# Altium PCB LP_LED_CUBE_8x8x8.PcbDoc (part 1 of 2)
Units mil, origin at the board's own origin, x right, y up, seen from the top; angles counter-clockwise.
Board outline 4240 x 2580 mil, 2 copper layers (Top Layer, Bottom Layer), stack 42.17 mil thick; 171 components, 249 nets, 833 pads, 0 vias.
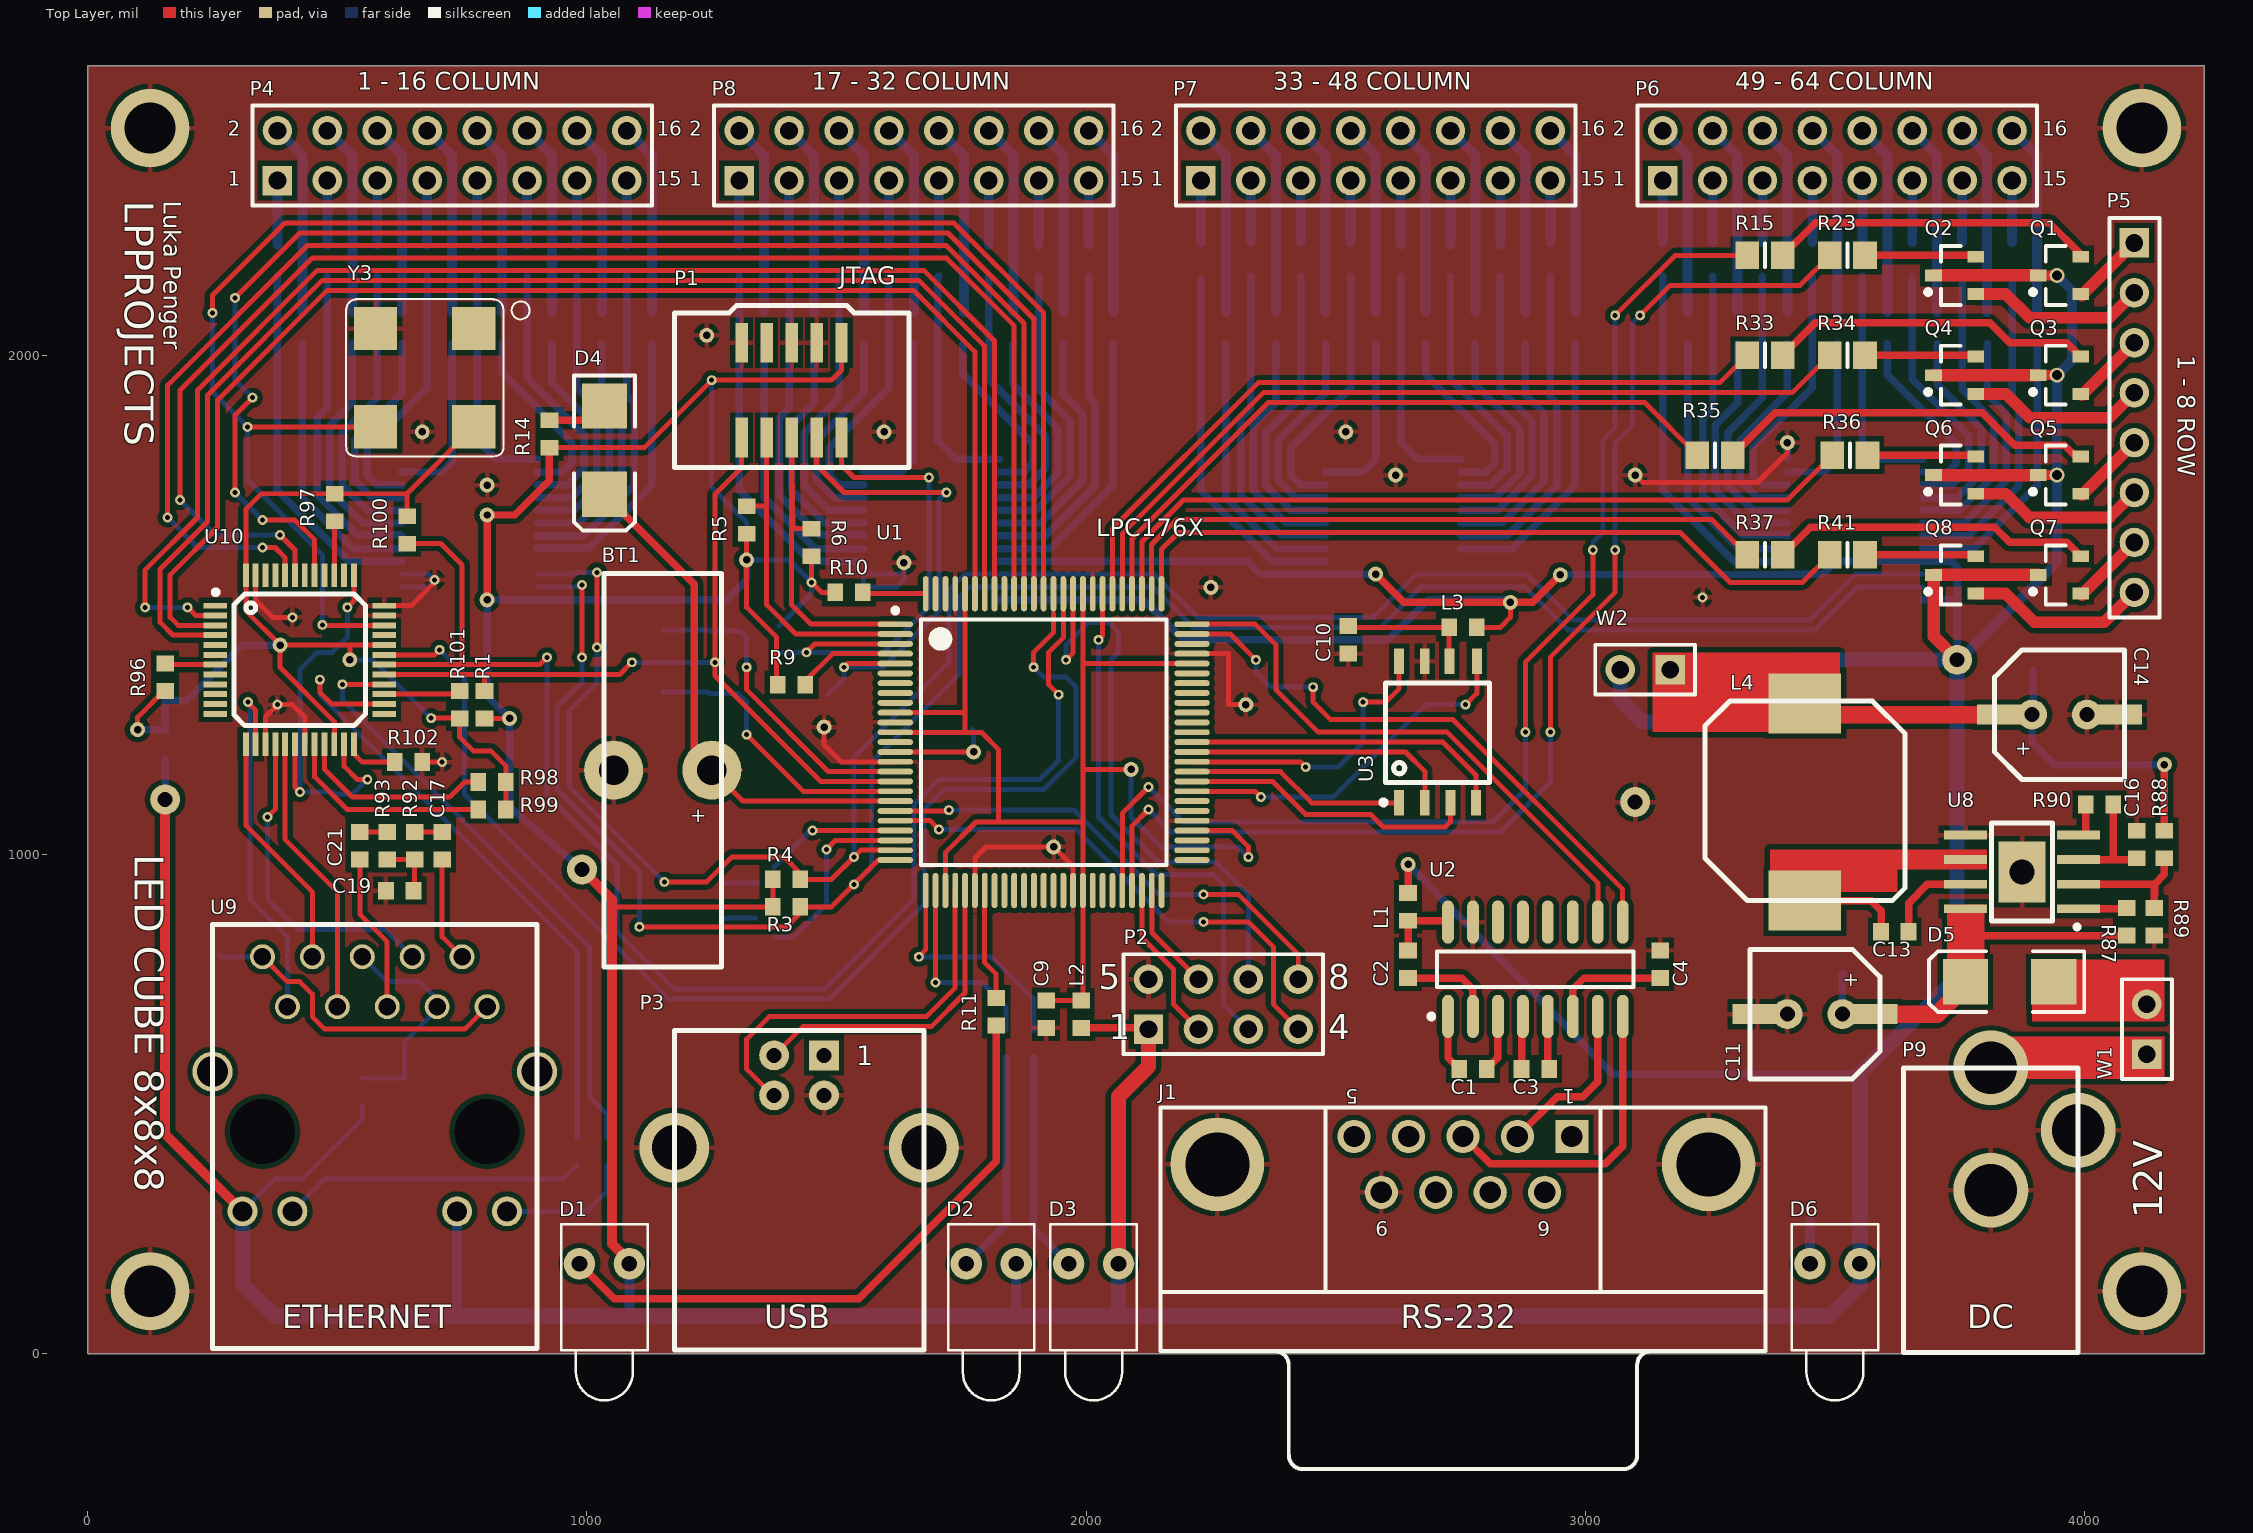
[diagram p0: Top Layer view]
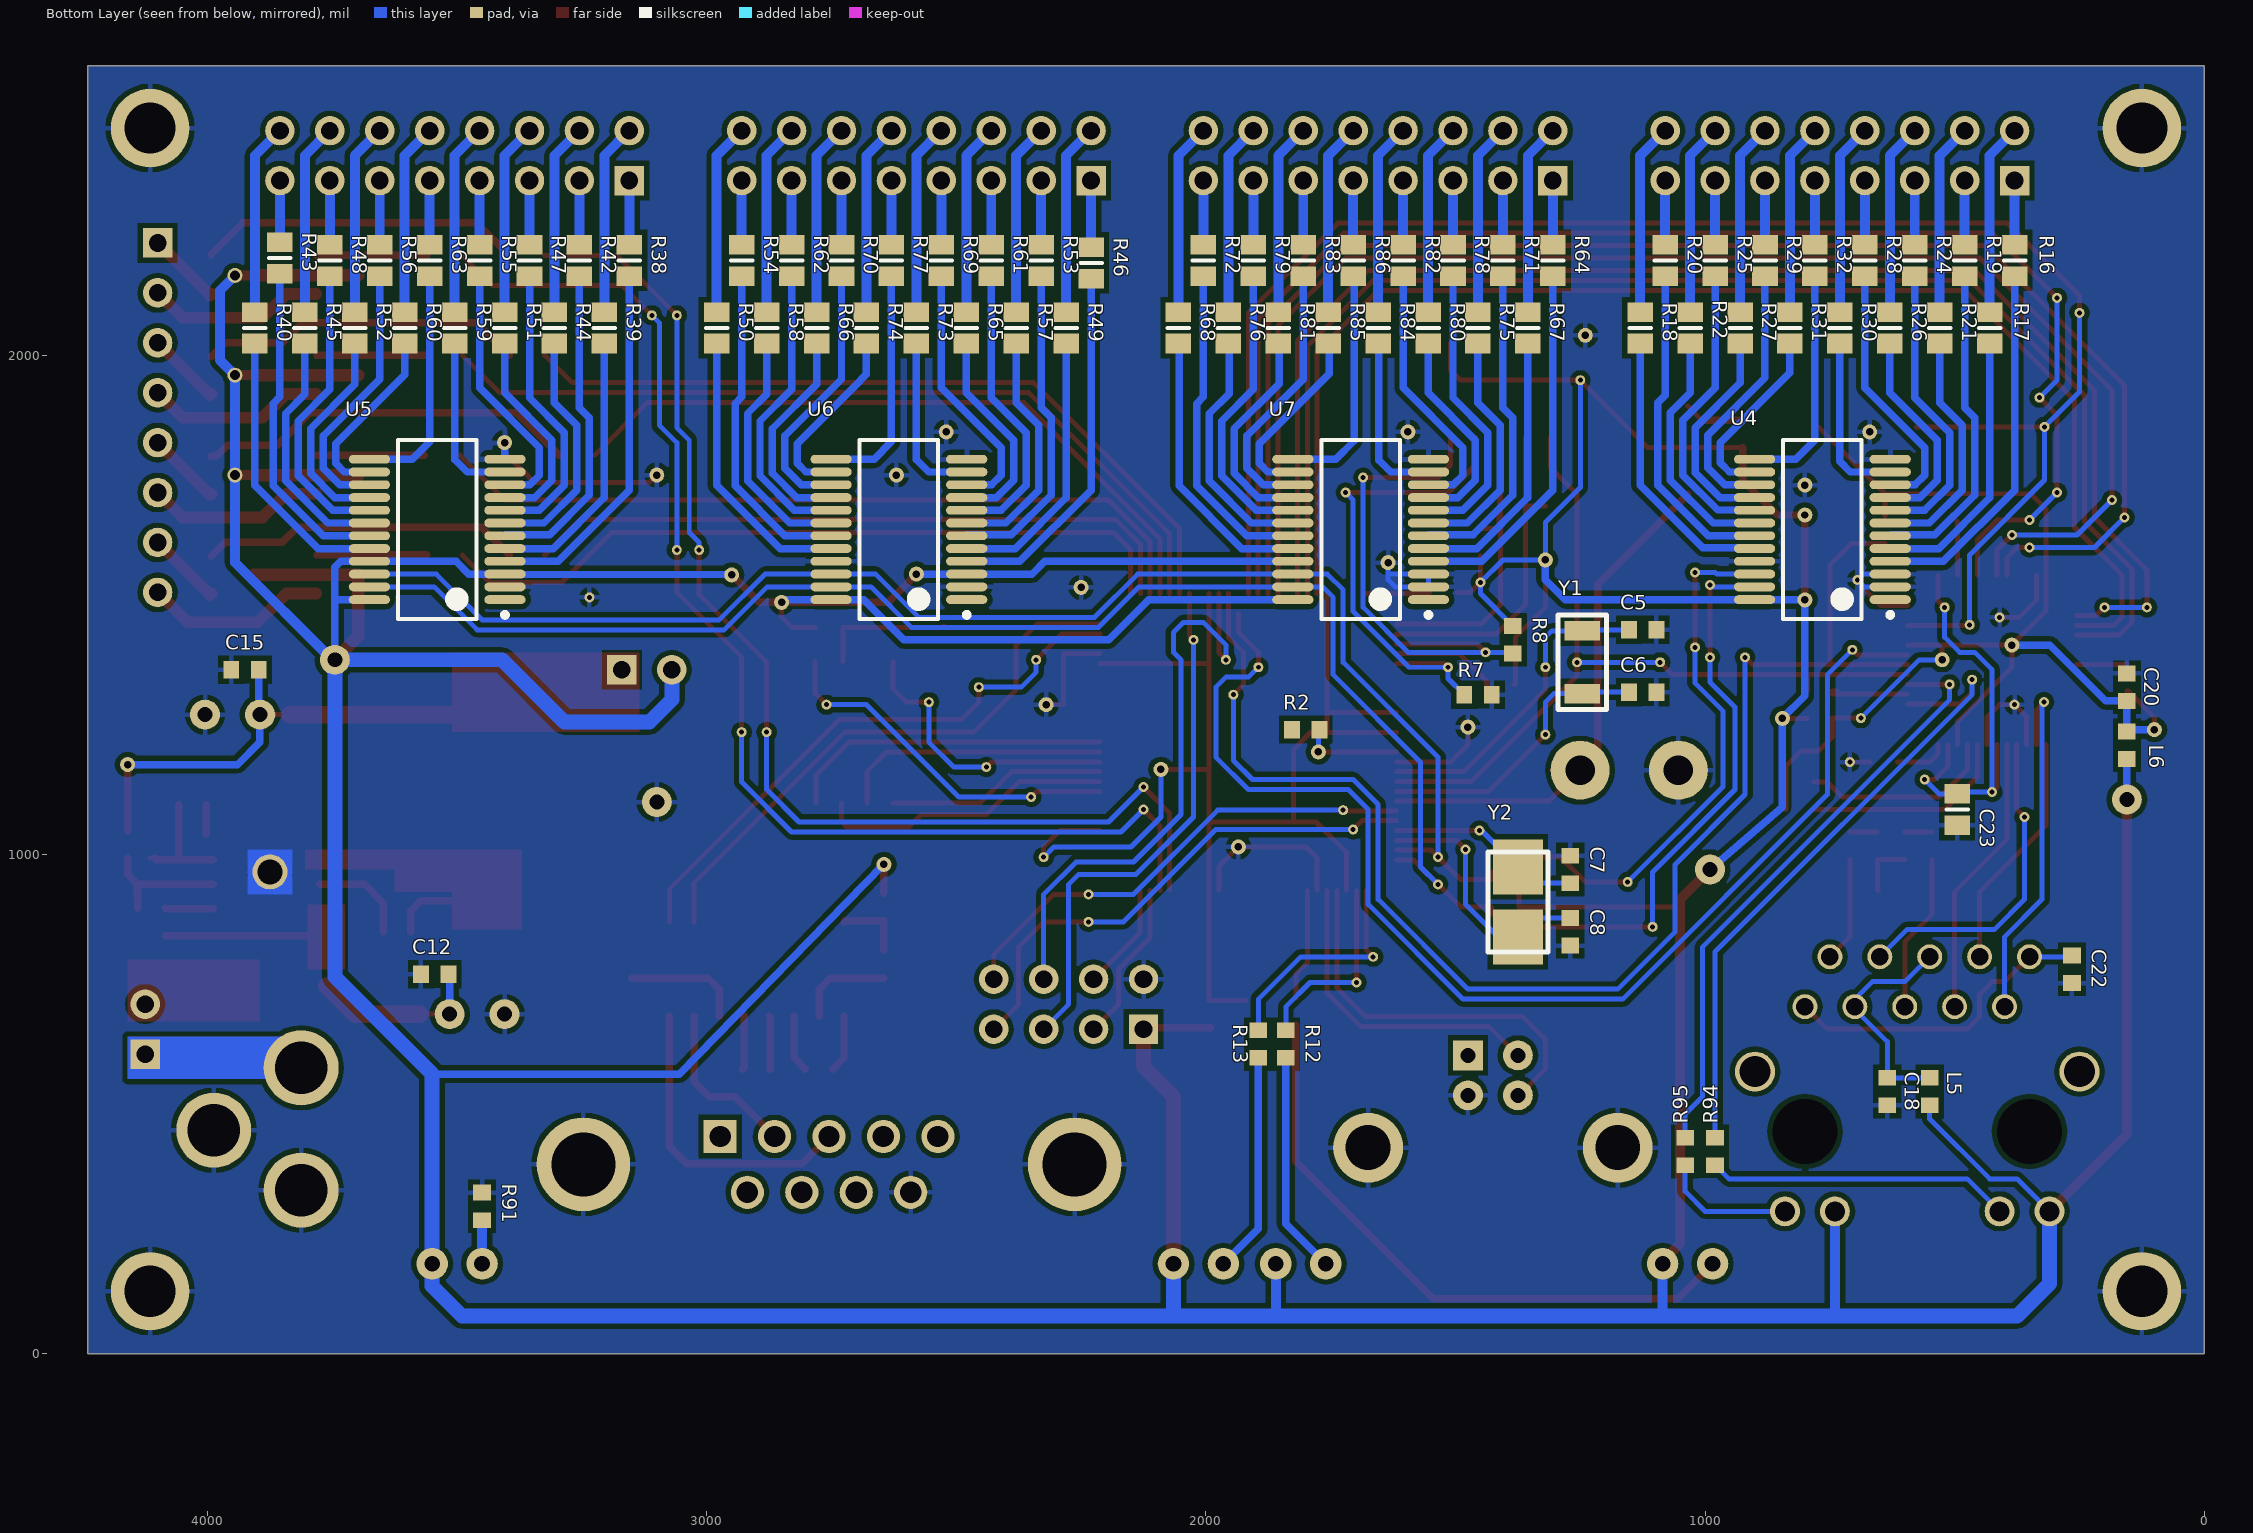
[diagram p1: Bottom Layer view, seen from below]

## Layer stack, top to bottom
Top Layer: signal copper 1.4
Dielectric: core 39.3701, FR-4, Dk 4.8
Bottom Layer: signal copper 1.4

## Board outline
4240,2580 4240,0 0,0 0,2580

## Design rules (kind name [scope] priority, off if disabled: settings)
Clearance [All] p1: gap=10
PolygonConnect [All] p1: connectstyle=Relief reliefconductorwidth=10 reliefentries=4 polygonreliefangle="90 Angle"
RoutingVias [All] p1: holewidth=28 width=50 viastyle="Through Hole" minholewidth=28 minwidth=50 maxholewidth=28 maxwidth=50
SilkscreenOverComponentPads [All] p1: minsilkscreentomaskgap=10
SolderMaskExpansion [All] p1: expansion=4
Width [All] p1: maxlimit=10 minlimit=10 preferedwidth=10
27 further rules are at their usual default settings.

## Classes and differential pairs
component class POWER: C11 C12 C13 C14 C15 C16 D5 D6 L4 P9 R87 R88 R89 R90 R91 U8 W1 W2
component class LED: P4 P5 P6 P7 P8 Q1 Q2 Q3 Q4 Q5 Q6 Q7 Q8 R15 R16 R17 R18 R19 R20 R21 R22 R23 R24 R25 R26 R27 R28 R29 R30 R31 R32 R33 R34 R35 R36 R37 R38 R39 R40 R41 R42 R43 R44 R45 R46 R47 R48 R49 R50 R51 R52 R53 R54 R55 R56 R57 R58 R59 R60 R61 R62 R63 R64 R65 R66 R67 R68 R69 R70 R71 R72 R73 R74 R75 R76 R77 R78 R79 R80 R81 R82 R83 R84 R85 R86 U4 U5 U6 U7
component class ETH: C17 C18 C19 C20 C21 C22 C23 L5 L6 R92 R93 R94 R95 R96 R97 R98 R99 R100 R101 R102 U9 U10 Y3
component class CPU: BT1 C1 C2 C3 C4 C5 C6 C7 C8 C9 C10 D1 D2 D3 D4 J1 L1 L2 L3 P1 P2 R1 R2 R3 R4 R5 R6 R7 R8 R9 R10 R11 R12 R13 R14 U1 U2 U3 Y1 Y2

## Components (designator, comment, footprint, x,y, rotation, side; value= is the part's Value field where it differs from the comment)
BT1 "Battery" "Battery CAP" 1270,775 r180 top
C1 "100n" 1608[0603] 2775,570 r180 top
C2 "100n" 1608[0603] 2645,780 r90 top
C3 "100n" 1608[0603] 2900,570 r180 top
C4 "100n" 1608[0603] 3150,780 r270 top
C5 "22p" 1608[0603] 1125,1450 r0 bottom
C6 "22p" 1608[0603] 1125,1325 r0 bottom
C7 "22p" 1608[0603] 1270,970 r270 bottom
C8 "22p" 1608[0603] 1270,845 r90 bottom
C9 "100n" 1608[0603] 1920,680 r90 top
C10 "100n" 1608[0603] 2525,1430 r90 top
C11 "220uF" "SMD CAPACITOR 220uF" 3460,680 r270 top
C12 "100n" 1608[0603] 3545,760 r0 bottom
C13 "0.47uF" 1608[0603] 3620,845 r180 top
C14 "220uF" "SMD CAPACITOR 220uF" 3950,1280 r90 top
C15 "100n" 1608[0603] 3925,1370 r0 bottom
C16 "0.47uF" 1608[0603] 4105,1020 r90 top
C17 "22n" 1608[0603] 710,1017.56 r90 top
C18 "100n" 1608[0603] 635,525 r270 bottom
C19 "1n" 1608[0603] 625,927.56 r180 top
C20 "100n" 1608[0603] 155,1335 r90 bottom
C21 "22n" 1608[0603] 545,1017.56 r90 top
C22 "NO" 1608[0603] 265,770 r90 bottom
C23 "100n" 6-0805_L 495,1090 r270 bottom
D1 "USB LED" LED-1 1035,180 r270 top
D2 "LED1" LED-1 1810,180 r270 top
D3 "LED2" LED-1 2015,180 r270 top
D4 "D Schottky" SMB 1035,1810 r270 top
D5 "Schottky" SMB 3850,745 r180 top
D6 "POWER LED" LED-1 3500,180 r270 top
J1 "RS232" DSUB1.385-2H9 2755,5 r180 top
L1 "Inductor" 1608[0603] 2645,895 r90 top
L2 "Inductor" 1608[0603] 1990,680 r270 top
L3 "Inductor" 1608[0603] 2755,1455 r0 top
L4 "1.5uH" Inductor 3440,1105 r90 top
L5 "Inductor" 1608[0603] 550,525 r270 bottom
L6 "Inductor" 1608[0603] 155,1218.72 r270 bottom
P1 "JTAG Connector ULINK" "JTAG Connector ULINK" 1410,1930 r270 top
P2 "Header 4X2A" HDR2X4_CEN 2125,650 r0 top
P3 "USB B" "USB B" 1425,505 r0 top
P4 "Header 8X2" HDR2X8 380,2350 r0 top
P5 "Header 8" HDR1X8 4100,2225 r270 top
P6 "Header 8X2" HDR2X8 3155,2350 r0 top
P7 "Header 8X2" HDR2X8 2230,2350 r0 top
P8 "Header 8X2" HDR2X8 1305,2350 r0 top
P9 "DC Connector" "DC Connector" 3900,450 r180 top
Q1 "NPN" SOT23_L 3950,2160 r180 top
Q2 "NPN" SOT23_L 3740,2160 r180 top
Q3 "NPN" SOT23_L 3950,1960 r180 top
Q4 "NPN" SOT23_L 3740,1960 r180 top
Q5 "NPN" SOT23_L 3950,1760 r180 top
Q6 "NPN" SOT23_L 3740,1760 r180 top
Q7 "NPN" SOT23_L 3950,1560 r180 top
Q8 "NPN" SOT23_L 3740,1560 r180 top
R1 "10k" 1608[0603] 795,1300 r270 top
R2 "NO" 1608[0603] 1800,1250 r0 bottom
R3 "2k2" 1608[0603] 1400,895 r0 top
R4 "2k2" 1608[0603] 1400,950 r0 top
R5 "10k" 1608[0603] 1320,1670 r270 top
R6 "10k" 1608[0603] 1450,1625 r270 top
R7 "10k" 1608[0603] 1455,1320 r180 bottom
R8 "10k" 1608[0603] 1385,1430 r90 bottom
R9 "10k" 1608[0603] 1410,1340 r180 top
R10 "10k" 1608[0603] 1525,1525 r180 top
R11 "470R" 1608[0603] 1820,685 r270 top
R12 "470R" 1608[0603] 1840,620 r270 bottom
R13 "470R" 1608[0603] 1895,620 r270 bottom
R14 "50R" 1608[0603] 925,1842.44 r270 top
R15 "4k7" 6-0805_N 3360,2200 r180 top
R16 "100R" 6-0805_L 380,2190 r270 bottom
R17 "100R" 6-0805_L 430,2055 r270 bottom
R18 "100R" 6-0805_L 1130,2055 r90 bottom
R19 "100R" 6-0805_L 480,2190 r270 bottom
R20 "100R" 6-0805_L 1080,2190 r90 bottom
R21 "100R" 6-0805_L 530,2055 r270 bottom
R22 "100R" 6-0805_L 1030,2055 r90 bottom
R23 "1k" 6-0805_N 3525,2200 r180 top
R24 "100R" 6-0805_L 580,2190 r270 bottom
R25 "100R" 6-0805_L 980,2190 r90 bottom
R26 "100R" 6-0805_L 630,2055 r270 bottom
R27 "100R" 6-0805_L 930,2055 r90 bottom
R28 "100R" 6-0805_L 680,2190 r270 bottom
R29 "100R" 6-0805_L 880,2190 r90 bottom
R30 "100R" 6-0805_L 730,2055 r270 bottom
R31 "100R" 6-0805_L 830,2055 r90 bottom
R32 "100R" 6-0805_L 780,2190 r90 bottom
R33 "1k" 6-0805_N 3360,2000 r180 top
R34 "1k" 6-0805_N 3525,2000 r180 top
R35 "1k" 6-0805_N 3260,1800 r180 top
R36 "1k" 6-0805_N 3530,1800 r180 top
R37 "1k" 6-0805_N 3360,1600 r180 top
R38 "100R" 6-0805_L 3155,2190 r270 bottom
R39 "100R" 6-0805_L 3205,2055 r270 bottom
R40 "100R" 6-0805_L 3905,2055 r90 bottom
R41 "1k" 6-0805_N 3525,1600 r180 top
R42 "100R" 6-0805_L 3255,2190 r270 bottom
R43 "100R" 6-0805_L 3855,2195 r90 bottom
R44 "100R" 6-0805_L 3305,2055 r270 bottom
R45 "100R" 6-0805_L 3805,2055 r90 bottom
R46 "100R" 6-0805_L 2230,2185 r270 bottom
R47 "100R" 6-0805_L 3355,2190 r270 bottom
R48 "100R" 6-0805_L 3755,2190 r90 bottom
R49 "100R" 6-0805_L 2280,2055 r270 bottom
R50 "100R" 6-0805_L 2980,2055 r90 bottom
R51 "100R" 6-0805_L 3405,2055 r270 bottom
R52 "100R" 6-0805_L 3705,2055 r90 bottom
R53 "100R" 6-0805_L 2330,2190 r270 bottom
R54 "100R" 6-0805_L 2930,2190 r90 bottom
R55 "100R" 6-0805_L 3455,2190 r270 bottom
R56 "100R" 6-0805_L 3655,2190 r90 bottom
R57 "100R" 6-0805_L 2380,2055 r270 bottom
R58 "100R" 6-0805_L 2880,2055 r90 bottom
R59 "100R" 6-0805_L 3505,2055 r270 bottom
R60 "100R" 6-0805_L 3605,2055 r90 bottom
R61 "100R" 6-0805_L 2430,2190 r270 bottom
R62 "100R" 6-0805_L 2830,2190 r90 bottom
R63 "100R" 6-0805_L 3555,2190 r90 bottom
R64 "100R" 6-0805_L 1305,2190 r270 bottom
R65 "100R" 6-0805_L 2480,2055 r270 bottom
R66 "100R" 6-0805_L 2780,2055 r90 bottom
R67 "100R" 6-0805_L 1355,2055 r270 bottom
R68 "100R" 6-0805_L 2055,2055 r90 bottom
R69 "100R" 6-0805_L 2530,2190 r270 bottom
R70 "100R" 6-0805_L 2730,2190 r90 bottom
R71 "100R" 6-0805_L 1405,2190 r270 bottom
R72 "100R" 6-0805_L 2005,2190 r90 bottom
R73 "100R" 6-0805_L 2580,2055 r270 bottom
R74 "100R" 6-0805_L 2680,2055 r90 bottom
R75 "100R" 6-0805_L 1455,2055 r270 bottom
R76 "100R" 6-0805_L 1955,2055 r90 bottom
R77 "100R" 6-0805_L 2630,2190 r90 bottom
R78 "100R" 6-0805_L 1505,2190 r270 bottom
R79 "100R" 6-0805_L 1905,2190 r90 bottom
R80 "100R" 6-0805_L 1555,2055 r270 bottom
R81 "100R" 6-0805_L 1855,2055 r90 bottom
R82 "100R" 6-0805_L 1605,2190 r270 bottom
R83 "100R" 6-0805_L 1805,2190 r90 bottom
R84 "100R" 6-0805_L 1655,2055 r270 bottom
R85 "100R" 6-0805_L 1755,2055 r90 bottom
R86 "100R" 6-0805_L 1705,2190 r90 bottom
R87 "10k" 1608[0603] 4085,865 r270 top
R88 "226k" 1608[0603] 4160,1020 r90 top
R89 "49.9k" 1608[0603] 4140,865 r90 top
R90 "100k" 1608[0603] 4030,1100 r0 top
R91 "470R" 1608[0603] 3450,295 r270 bottom
R92 "75R" 1608[0603] 655,1017.56 r270 top
R93 "75R" 1608[0603] 600,1017.56 r90 top
R94 "470R" 1608[0603] 980,405 r90 bottom
R95 "470R" 1608[0603] 1040,405 r90 bottom
R96 "10k" 1608[0603] 155,1355 r270 top
R97 "2k2" 1608[0603] 495,1695 r270 top
R98 "2k2" 1608[0603] 810,1145 r180 top
R99 "2k2" 1608[0603] 810,1090 r0 top
R100 "2k2" 1608[0603] 640,1650 r270 top
R101 "2k2" 1608[0603] 745,1300 r90 top
R102 "4k7" 1608[0603] 642.44,1185 r0 top
U1 "LPC1768FBD100" SOT407-1_N 1915,1225 r0 top
U2 "MAX2232" SOIC16_N 2900,770 r90 top
U3 "AT45DB321D" AT45DB321D 2705,1245 r90 top
U4 "PCA9555" SSOP24_N 765,1600 r0 bottom
U5 "PCA9555" SSOP24_N 3540,1600 r0 bottom
U6 "PCA9555" SSOP24_N 2615,1600 r0 bottom
U7 "PCA9555" SSOP24_N 1690,1600 r0 bottom
U8 "TPS56528" TPS56528 3875,965 r180 top
U9 "RJ45 Ethernet" "RJ45 Ethernet connector" 575,540 r90 top
U10 "DP83848C" DP83848C 425,1390 r0 top
W1 "Jumper" HDR1X2 4125,600 r90 top
W2 "Jumper" HDR1X2 3170,1370 r180 top
Y1 "32.768KHz" "Crystal 4.1x1.5" 1245,1385 r270 bottom
Y2 "12MHz" "5x3.2 Crystal" 1375,905 r270 bottom
Y3 "XTAL 50MHz" "XTAL ACT9200" 675,1955 r180 top

## Footprints (in the part's own frame and the unit in brackets; to place one, negate y for a bottom-side part, rotate by r counter-clockwise, add the part's x,y. Pads: shape width x height; smd on the part's side, far side on the other; paste and mask are expansions set on the pad)
"5x3.2 Crystal" [mil]
  rect 110x100 smd: 1(-70,0) 2(70,0)
  silkscreen extent -100,-60 100,60
6-0805_L [mm] "Chip Resistor, Body 2.0x1.2mm, IPC High Density"
  rect 1x1.3 smd: 1(-0.8,0) 2(0.8,0)
  silkscreen extent 0,-0.55 0,0.55, body extent -1.07,-0.7 1.07,0.7, height 0.7
6-0805_N [mm] "Chip Resistor, Body 2.0x1.2mm, IPC Medium Density"
  rect 1.2x1.4 smd: 1(-0.9,0) 2(0.9,0)
  silkscreen extent 0,-0.6 0,0.6, body extent -1.07,-0.7 1.07,0.7, height 0.7
1608[0603] [mm] "Chip Capacitor, Body 1.6x0.8mm, IPC High Density"
  rect 0.8x0.9 smd: 1(-0.7,0) 2(0.7,0)
  body extent -0.87,-0.48 0.87,0.48, height 1.3
AT45DB321D [mm] "SPI Flash SOIC 8"
  rect 1.3x0.508 smd: 1(-3.6,1.975) 2(-3.6,0.675) 3(-3.6,-0.625) 4(-3.6,-1.925) 5(3.6,-1.975) 6(3.6,-0.575) 7(3.6,0.675) 8(3.6,1.975)
  silkscreen extent -3.7,-2.62 2.5,2.9
"Battery CAP" [mm]
  round 3 hole 1.5: 1(0.5,-10) 2(5.5,-10)
  silkscreen extent 0,-20 6,0
"Crystal 4.1x1.5" [mm] "Crystal 4.1x1.5"
  rect 1x1.8 smd: 1(-1.6,-0.02) 2(1.6,-0.02)
  silkscreen extent -2.4,-1.25 2.4,1.2
"DC Connector" [mil]
  round 150 hole 105: 1(87.5,-122.5) 2(-87.5,2.5) 3(87.5,122.5)
  silkscreen extent -88,-123 262,448
DP83848C [mm] "Ethernet PHY LQFP48"
  rect 1.2x0.3 smd: 1(-4.3,2.75) 2(-4.3,2.25) 3(-4.3,1.75) 4(-4.3,1.25) 5(-4.3,0.75) 6(-4.3,0.25) 7(-4.3,-0.25) 8(-4.3,-0.75) 9(-4.3,-1.25) 10(-4.3,-1.75) 11(-4.3,-2.25) 12(-4.3,-2.75) 25(4.3,-2.75) 26(4.3,-2.25) 27(4.3,-1.75) 28(4.3,-1.25) 29(4.3,-0.75) 30(4.3,-0.25) 31(4.3,0.25) 32(4.3,0.75) 33(4.3,1.25) 34(4.3,1.75) 35(4.3,2.25) 36(4.3,2.75)
  rect 0.3x1.2 smd: 13(-2.75,-4.3) 14(-2.25,-4.3) 15(-1.75,-4.3) 16(-1.25,-4.3) 17(-0.75,-4.3) 18(-0.25,-4.3) 19(0.25,-4.3) 20(0.75,-4.3) 21(1.25,-4.3) 22(1.75,-4.3) 23(2.25,-4.3) 24(2.75,-4.3) 37(2.75,4.3) 38(2.25,4.3) 39(1.75,4.3) 40(1.25,4.3) 41(0.75,4.3) 42(0.25,4.3) 43(-0.25,4.3) 44(-0.75,4.3) 45(-1.25,4.3) 46(-1.75,4.3) 47(-2.25,4.3) 48(-2.75,4.3)
  silkscreen extent -4.41,-3.35 3.35,3.56
DSUB1.385-2H9 [mm] "Connector; D Subminiature; 9 Position; Right Angle; Pitch 1.385 mm"
  rect 1.69x1.69 hole 1.09: 1(-5.54,-10.92)
  round 1.69 hole 1.09: 2(-2.77,-10.92) 3(0,-10.92) 4(2.77,-10.92) 5(5.54,-10.92) 6(-4.155,-8.08) 7(-1.385,-8.08) 8(1.385,-8.08) 9(4.155,-8.08)
  round 4.76 hole 3.26: 10(-12.495,-9.5) 11(12.495,-9.5)
  silkscreen extent -15.4,-12.4 15.4,6
HDR1X2 [mm] "Connector; Header; 2 Position"
  rect 1.5x1.5 hole 0.9: 1(0,0)
  round 1.5 hole 0.9: 2(2.54,0)
  silkscreen extent -1.27,-1.27 3.81,1.27
HDR1X8 [mm] "Connector; Header; 8 Position"
  rect 1.5x1.5 hole 0.9: 1(0,0)
  round 1.5 hole 0.9: 2(2.54,0) 3(5.08,0) 4(7.62,0) 5(10.16,0) 6(12.7,0) 7(15.24,0) 8(17.78,0)
  silkscreen extent -1.27,-1.27 19.05,1.27
HDR2X4_CEN [mm] "Connector; Header; 4x2 Position"
  rect 1.5x1.5 hole 0.9: 1(0,0)
  round 1.5 hole 0.9: 2(2.54,0) 3(5.08,0) 4(7.62,0) 5(0,2.54) 6(2.54,2.54) 7(5.08,2.54) 8(7.62,2.54)
  silkscreen extent -1.27,-1.27 8.89,3.81
HDR2X8 [mm] "Connector; Header; 8x2 Position"
  rect 1.5x1.5 hole 0.9: 1(0,0)
  round 1.5 hole 0.9: 2(0,2.54) 3(2.54,0) 4(2.54,2.54) 5(5.08,0) 6(5.08,2.54) 7(7.62,0) 8(7.62,2.54) 9(10.16,0) 10(10.16,2.54) 11(12.7,0) 12(12.7,2.54) 13(15.24,0) 14(15.24,2.54) 15(17.78,0) 16(17.78,2.54)
  silkscreen extent -1.27,-1.27 19.05,3.81
Inductor [mil]
  rect 120x145 smd: 1(-197.5,0) 2(197.5,0)
  silkscreen extent -198,-200 202,200
"JTAG Connector ULINK" [mil]
  rect 80x25 smd: 1(-95,100) 2(95,100) 3(-95,50) 4(95,50) 5(-95,0) 6(95,0) 7(-95,-50) 8(95,-50) 9(-95,-100) 10(95,-100)
  silkscreen extent -170,-235 155,235
LED-1 [mm] "LED; 2 Leads"
  round 1.6 hole 0.8: 1(0,1.27) 2(0,-1.27)
  silkscreen extent -2,-2.2 6.95,2.2
"RJ45 Ethernet connector" [mil]
  round 50 hole 35: 1(155,175) 2(255,125) 3(155,75) 4(255,25) 5(155,-25) 6(255,-75) 7(155,-125) 8(255,-175) 9(255,225) 10(155,-225)
  round 60 hole 40: 11(-255,265) 12(-255,165) 13(-255,-165) 14(-255,-265)
  round 80 hole 62: GND(25,325) GND(25,-325)
  round 0 hole 130: ""(-95,225) ""(-95,-225)
  silkscreen extent -530,-325 320,325
SMB [mm] "DO-214-AA/SMB; 2 C-Bend Leads; Body 5.3 x 3.6 mm, inc. leads (LxW)"
  rect 2.3x2.3 smd: 1(-2.25,0) 2(2.25,0)
  silkscreen extent -3.8,-1.55 4.1,1.55
"SMD CAPACITOR 220uF" [mil]
  rect 40x100 smd: 1(0,115) 2(0,-115)
  round 60 hole 30: 1(0,55) 2(0,-55)
  silkscreen extent -130,-130 130,130
SOIC16_N [mm] "SOIC, 16-Leads, Body 9.9x3.9mm, Pitch 1.27mm, IPC Medium Density"
  oval 2.2x0.6 smd: 1(-2.4,4.445) 2(-2.4,3.175) 3(-2.4,1.905) 4(-2.4,0.635) 5(-2.4,-0.635) 6(-2.4,-1.905) 7(-2.4,-3.175) 8(-2.4,-4.445) 9(2.4,-4.445) 10(2.4,-3.175) 11(2.4,-1.905) 12(2.4,-0.635) 13(2.4,0.635) 14(2.4,1.905) 15(2.4,3.175) 16(2.4,4.445)
  silkscreen extent -2.52,-5 0.9,5.42, body extent -2,-5 2,5, height 1.91
SOT23_L [mm] "SOT23, 3-Leads, Body 2.9x1.3mm, Pitch 0.95mm, Lead Span 2.3mm - Reverse Pinning, IPC High Density"
  rect 0.85x0.6 smd: 1(1.075,0) 2(-1.075,-0.95) 3(-1.075,0.95)
  silkscreen extent -0.3,-1.5 1.47,1.5, body extent -0.7,-1.5 0.7,1.5, height 1.1
SOT407-1_N [mm] "Thin QFP, 100-Leads, Body 14x14mm, Pitch 0.5mm, IPC Medium Density"
  oval 1.8x0.3 smd: 1(-7.55,6) 2(-7.55,5.5) 3(-7.55,5) 4(-7.55,4.5) 5(-7.55,4) 6(-7.55,3.5) 7(-7.55,3) 8(-7.55,2.5) 9(-7.55,2) 10(-7.55,1.5) 11(-7.55,1) 12(-7.55,0.5) 13(-7.55,0) 14(-7.55,-0.5) 15(-7.55,-1) 16(-7.55,-1.5) 17(-7.55,-2) 18(-7.55,-2.5) 19(-7.55,-3) 20(-7.55,-3.5) 21(-7.55,-4) 22(-7.55,-4.5) 23(-7.55,-5) 24(-7.55,-5.5) 25(-7.55,-6) 51(7.55,-6) 52(7.55,-5.5) 53(7.55,-5) 54(7.55,-4.5) 55(7.55,-4) 56(7.55,-3.5) 57(7.55,-3) 58(7.55,-2.5) 59(7.55,-2) 60(7.55,-1.5) 61(7.55,-1) 62(7.55,-0.5) 63(7.55,0) 64(7.55,0.5) 65(7.55,1) 66(7.55,1.5) 67(7.55,2) 68(7.55,2.5) 69(7.55,3) 70(7.55,3.5) 71(7.55,4) 72(7.55,4.5) 73(7.55,5) 74(7.55,5.5) 75(7.55,6)
  oval 0.3x1.8 smd: 26(-6,-7.55) 27(-5.5,-7.55) 28(-5,-7.55) 29(-4.5,-7.55) 30(-4,-7.55) 31(-3.5,-7.55) 32(-3,-7.55) 33(-2.5,-7.55) 34(-2,-7.55) 35(-1.5,-7.55) 36(-1,-7.55) 37(-0.5,-7.55) 38(0,-7.55) 39(0.5,-7.55) 40(1,-7.55) 41(1.5,-7.55) 42(2,-7.55) 43(2.5,-7.55) 44(3,-7.55) 45(3.5,-7.55) 46(4,-7.55) 47(4.5,-7.55) 48(5,-7.55) 49(5.5,-7.55) 50(6,-7.55) 76(6,7.55) 77(5.5,7.55) 78(5,7.55) 79(4.5,7.55) 80(4,7.55) 81(3.5,7.55) 82(3,7.55) 83(2.5,7.55) 84(2,7.55) 85(1.5,7.55) 86(1,7.55) 87(0.5,7.55) 88(0,7.55) 89(-0.5,7.55) 90(-1,7.55) 91(-1.5,7.55) 92(-2,7.55) 93(-2.5,7.55) 94(-3,7.55) 95(-3.5,7.55) 96(-4,7.55) 97(-4.5,7.55) 98(-5,7.55) 99(-5.5,7.55) 100(-6,7.55)
  silkscreen extent -7.67,-6.25 6.25,6.82, body extent -7,-7 7,7, height 1.6
SSOP24_N [mm] "SOP, 24-Leads, Body 6.2x5.3mm, Pitch 0.65mm, IPC Medium Density"
  oval 2.1x0.45 smd: 1(-3.45,2.275) 2(-3.45,1.625) 3(-3.45,0.975) 4(-3.45,0.325) 5(-3.45,-0.325) 6(-3.45,-0.975) 7(-3.45,-1.625) 8(-3.45,-2.275) 9(-3.45,-2.92) 10(-3.45,-3.57) 11(-3.45,-4.22) 12(-3.45,-4.87) 13(3.45,-4.87) 14(3.45,-4.22) 15(3.45,-3.57) 16(3.45,-2.92) 17(3.45,-2.275) 18(3.45,-1.625) 19(3.45,-0.975) 20(3.45,-0.325) 21(3.45,0.325) 22(3.45,0.975) 23(3.45,1.625) 24(3.45,2.275)
  silkscreen extent -3.57,-5.85 2,3.25, body extent -2.7,-5.85 2.7,3.25, height 2
TPS56528 [mm] "Step-Down Converter SO PowerPAD"
  rect 2.2x0.45 smd: 1(-2.875,1.875) 2(-2.875,0.625) 3(-2.875,-0.625) 4(-2.875,-1.875) 5(2.875,-1.875) 6(2.875,-0.625) 7(2.875,0.625) 8(2.875,1.875)
  rect 2.4x3.1 smd: 5(0,0)
  silkscreen extent -2.9,-2.5 1.55,2.9
"USB B" [mil]
  rect 60x60 hole 30: 1(50,92.5)
  round 60 hole 30: 2(-50,92.5) 3(-50,12.5) 4(50,12.5)
  round 140 hole 90: 5(-250,-92.5) 5(250,-92.5)
  silkscreen extent -250,-498 250,142
"XTAL ACT9200" [mm]
  rect 2.2x2.2 smd mask-25.4: 1(-2.5,-2.5) 2(2.5,-2.5) 3(2.5,2.5) 4(-2.5,2.5)
  silkscreen extent -5.34,-4 4,4

## Part data
BT1: "Multicell Battery"
C1 C2 C3 C4 C5 C6 C7 C8 C9 C10 C12 C13 C15 C16 C17 C18 C19 C20 C21 C22 C23: library part Cap, "Capacitor"
C11 C14: library part "Cap Pol1", "Capacitor"
D1 D2 D3 D6: library part LED0, "Typical INFRARED GaAs LED"
D4: "Schottky Diode"
D5: library part "D Schottky", "Schottky Diode"
J1: library part "D Connector 9", "Receptacle Assembly, 9 Position, Right Angle"
L4: library part "Inductor Iron", "Magnetic-Core Inductor"
P1: "JTAG Connector"
P2: "Header, 4-Pin, Dual row"
P3: "USB Connector"
P4 P6 P7 P8: "Header, 8-Pin, Dual row"
P5: "Header, 8-Pin"
P9: "DC Power Connector"
Q1 Q2 Q3 Q4 Q5 Q6 Q7 Q8: "NPN Bipolar Transistor"
R1 R2 R3 R4 R5 R6 R7 R8 R9 R10 R11 R12 R13 R14 R15 R16 R17 R18 R19 R20 R21 R22 R23 R24 R25 R26 R27 R28 R29 R30 R31 R32 R33 R34 R35 R36 R37 R38 R39 R40 R41 R42 R43 R44 R45 R46 R47 R48 R49 R50 R51 R52 R53 R54 R55 R56 R57 R58 R59 R60 R61 R62 R63 R64 R65 R66 R67 R68 R69 R70 R71 R72 R73 R74 R75 R76 R77 R78 R79 R80 R81 R82 R83 R84 R85 R86 R87 R88 R89 R90 R91 R92 R93 R94 R95 R96 R97 R98 R99 R100 R101 R102: library part Res2, "Resistor"
U1: "32-bit ARM Cortex-M3 microcontroller; up to 512 kB flash and 64 kB SRAM with Ethernet, USB 2.0 Host/Device/OTG, CAN"
U2: "Dual 232 +3V3"
U3: "SPI Flash 32MB"
U4 U5 U6 U7: "I2C I/O Ports"
U8: "Step-Down Converter 5A 4.5V-18V"
U9: "Ethernet Connector"
U10: "Ethernet PHY"
W1 W2: "Jumper Wire"
Y1 Y2: library part XTAL, "Crystal Oscillator"
Y3: library part "XTAL ACT9200"

## Free pads (board coordinates)
  round 20 hole 10: 0(3235,1515) 8(321.12,1305.2) 12(360,1075) 17(1452.17,1047.83) 18(1480,1010) 19(1320,1240) 20(1320,1375) 21(1256.75,1385) 22(1440,1405) 23(1685,1755) 24(1515,1375) 25(1720,1725) 28(1450,1545) 29(1250,1950) 30(1535,940) 32(1535,995) 39(320,1856.57) 40(470,1460) 41(425,1125) 42(2440,1175) 43(2555,1305) 44(2760,1300) 45(2350,1115) 46(510,1340.79) 48(465,1350) 51(410,1475) 54(1665,795) 55(1698.46,743.46) 57(2455,1335) 58(2340,1390) 59(1725,1088.72) 60(1705,1050) 61(2025,1430) 62(1960,1390) 63(2235,920) 64(2235,865) 68(380,1300) 69(560,1150) 70(710,1185) 71(520,1495) 73(688.02,1273.02) 75(1090,1385) 83(2125,1135) 84(2125,1090) 85(2325,994.51) 89(3110,2080) 90(3060,2080) 91(3060,1610) 92(3015,1610) 93(2880,1245) 94(2930,1245) 98(350,1670) 99(385,1640) 100(350,1615) 101(185,1710) 102(160,1675) 104(295,1725) 105(330,1915) 106(295,2115) 107(695,1550) 108(920,1395) 110(705,1410) 111(1895,1375) 112(1945,1320) 113(990,1540) 114(1020,1565) 116(990,1395) 117(1020,1415) 118(1155,945) 119(1105,855) 120(250,2085) 121(200,1495) 122(115,1495)
  round 30 hole 15: 1(670.25,1846.45) 1(1595.25,1846.45) 1(2520.25,1846.45) 1(3405,1825) 2(4160,1180) 3(2645,980) 9(800,1510) 10(800,1680) 14(845,1272.44) 26(1320,1590) 27(1240,2040) 33(2950,1560) 34(2850,1505) 35(2580,1561.61) 36(1635,1584.5) 37(1774.69,1205.32) 49(1475,1255) 50(800,1740) 52(2620,1760) 53(2250,1535) 56(1935,1015) 65(2320,1300) 67(385.47,1419.53) 72(100,1250) 74(525,1390) 77(3100,1760) 86(2090,1170.49)
  round 60 hole 30: 11(990,970) 38(155,1110) 76(3745,1390) 95(3100,1105)
  round 70 hole 50: 16(3875,965)
  round 30 hole 20: 78(3945,1760) 87(3945,1960) 88(3945,2160)
  round 157.48 hole 102.36: ""(125,125) ""(125,2455) ""(4115,125) ""(4115,2455)

## Nets (pads, with @x,y where several pads share a name; then routed paths per layer and width w, separated by ;. In a path a pad name is that pad's centre, name@x,y a point inside that pad or via, vN(x,y) a via of type N, cw(c..) or ccw(c..) an arc to the next point about the centre after c; other vN are vias at no path point)
3V3_PHY: C20.1 L6.1 pad.67 pad.72 pad.73 pad.74 R96.2 R97.1 R98.1 R99.2 R100.1 R101.1 U10.22 U10.32 U10.48 Y3.4 | length 2359.3
  Top Layer w10: pad.72@100,1250 100,1275 152.44,1327.44 R96.2@155,1327.44 ; U10.22@493.9,1220.71 493.9,1266.1 385.47,1374.53 pad.67@385.47,1419.53 ; pad.74@525,1390 525,1419.53 ; U10.32@594.29,1419.53 525,1419.53 ; R100.1@640,1677.56 639.41,1678.15 639.41,1722.56 ; pad.73@688.02,1273.02 744.42,1273.02 R101.1@745,1272.44 745,1235 772.56,1207.44 807.56,1207.44 837.56,1177.44 R98.1@837.56,1145 R99.2@837.56,1090 ; Y3.4@773.43,1856.57 639.41,1722.56 ; pad.67@385.47,1419.53 316.73,1488.27 U10.48@316.73,1559.29 316.73,1691.73 347.56,1722.56 R97.1@495,1722.56 639.41,1722.56 ; pad.67@385.47,1419.53 525,1419.53
  Bottom Layer w10: L6.1@151.28,1250 L6.1@155,1246.28 ; pad.74@525,1390 571.05,1390 pad.73@688.02,1273.02
  Bottom Layer w15: pad.72@100,1250 L6.1@151.28,1250 ; L6.1@155,1246.28 C20.1@155,1307.44 197.44,1307.44 309.53,1419.53 pad.67@385.47,1419.53
AD0-4: P2.4 pad.60 pad.64 U1.21 | length 1047.6
  Top Layer w10: U1.21@1617.76,1067.52 1687.48,1067.52 pad.60@1705,1050 ; pad.64@2235,865 2325,865 2375,815 2375,700 P2.4@2425,650
  Bottom Layer w10: pad.60@1705,1050 1980,1050 2165,865 pad.64@2235,865
AD0-5: P2.8 pad.59 pad.63 U1.20 | length 978.4
  Top Layer w10: U1.20@1617.76,1087.2 1725,1087.2 pad.59@1725,1088.72 ; pad.63@2235,920 2305,920 2425,800 P2.8@2425,750
  Bottom Layer w10: pad.59@1725,1088.72 1976.28,1088.72 2145,920 pad.63@2235,920
CO1_0: P4.1 R16.1 | length 128.5
  Bottom Layer w20: R16.1@380,2221.5 P4.1@380,2350
CO1_1: P4.2 R17.1 | length 384.2
  Bottom Layer w20: P4.2@380,2450 430,2400 R17.1@430,2086.5
CO1_2: P4.3 R19.1 | length 128.5
  Bottom Layer w20: R19.1@480,2221.5 P4.3@480,2350
CO1_3: P4.4 R21.1 | length 384.2
  Bottom Layer w20: P4.4@480,2450 530,2400 R21.1@530,2086.5
CO1_4: P4.5 R24.1 | length 128.5
  Bottom Layer w20: R24.1@580,2221.5 P4.5@580,2350
CO1_5: P4.6 R26.1 | length 384.2
  Bottom Layer w20: P4.6@580,2450 630,2400 R26.1@630,2086.5
CO1_6: P4.7 R28.1 | length 128.5
  Bottom Layer w20: R28.1@680,2221.5 P4.7@680,2350
CO1_7: P4.8 R30.1 | length 384.2
  Bottom Layer w20: P4.8@680,2450 730,2400 R30.1@730,2086.5
CO1_8: P4.9 R32.2 | length 128.5
  Bottom Layer w20: R32.2@780,2221.5 P4.9@780,2350
CO1_9: P4.10 R31.2 | length 384.2
  Bottom Layer w20: P4.10@780,2450 830,2400 R31.2@830,2086.5
CO1_10: P4.11 R29.2 | length 128.5
  Bottom Layer w20: R29.2@880,2221.5 P4.11@880,2350
CO1_11: P4.12 R27.2 | length 384.2
  Bottom Layer w20: P4.12@880,2450 930,2400 R27.2@930,2086.5
CO1_12: P4.13 R25.2 | length 128.5
  Bottom Layer w20: R25.2@980,2221.5 P4.13@980,2350
CO1_13: P4.14 R22.2 | length 384.2
  Bottom Layer w20: P4.14@980,2450 1030,2400 R22.2@1030,2086.5
CO1_14: P4.15 R20.2 | length 128.5
  Bottom Layer w20: R20.2@1080,2221.5 P4.15@1080,2350
CO1_15: P4.16 R18.2 | length 384.2
  Bottom Layer w20: P4.16@1080,2450 1130,2400 R18.2@1130,2086.5
CO2_0: P8.1 R64.1 | length 128.5
  Bottom Layer w20: R64.1@1305,2221.5 P8.1@1305,2350
CO2_1: P8.2 R67.1 | length 384.2
  Bottom Layer w20: P8.2@1305,2450 1355,2400 R67.1@1355,2086.5
CO2_2: P8.3 R71.1 | length 128.5
  Bottom Layer w20: R71.1@1405,2221.5 P8.3@1405,2350
CO2_3: P8.4 R75.1 | length 384.2
  Bottom Layer w20: P8.4@1405,2450 1455,2400 R75.1@1455,2086.5
CO2_4: P8.5 R78.1 | length 128.5
  Bottom Layer w20: R78.1@1505,2221.5 P8.5@1505,2350
CO2_5: P8.6 R80.1 | length 384.2
  Bottom Layer w20: P8.6@1505,2450 1555,2400 R80.1@1555,2086.5
CO2_6: P8.7 R82.1 | length 128.5
  Bottom Layer w20: R82.1@1605,2221.5 P8.7@1605,2350
CO2_7: P8.8 R84.1 | length 384.2
  Bottom Layer w20: P8.8@1605,2450 1655,2400 R84.1@1655,2086.5
CO2_8: P8.9 R86.2 | length 128.5
  Bottom Layer w20: R86.2@1705,2221.5 P8.9@1705,2350
CO2_9: P8.10 R85.2 | length 384.2
  Bottom Layer w20: P8.10@1705,2450 1755,2400 R85.2@1755,2086.5
CO2_10: P8.11 R83.2 | length 128.5
  Bottom Layer w20: R83.2@1805,2221.5 P8.11@1805,2350
CO2_11: P8.12 R81.2 | length 384.2
  Bottom Layer w20: P8.12@1805,2450 1855,2400 R81.2@1855,2086.5
CO2_12: P8.13 R79.2 | length 128.5
  Bottom Layer w20: R79.2@1905,2221.5 P8.13@1905,2350
CO2_13: P8.14 R76.2 | length 384.2
  Bottom Layer w20: P8.14@1905,2450 1955,2400 R76.2@1955,2086.5
CO2_14: P8.15 R72.2 | length 128.5
  Bottom Layer w20: R72.2@2005,2221.5 P8.15@2005,2350
CO2_15: P8.16 R68.2 | length 384.2
  Bottom Layer w20: P8.16@2005,2450 2055,2400 R68.2@2055,2086.5
CO3_0: P7.1 R46.1 | length 123.5
  Bottom Layer w20: R46.1@2230,2226.5 P7.1@2230,2350
CO3_1: P7.2 R49.1 | length 384.2
  Bottom Layer w20: P7.2@2230,2450 2280,2400 R49.1@2280,2086.5
CO3_2: P7.3 R53.1 | length 123.5
  Bottom Layer w20: R53.1@2330,2226.5 P7.3@2330,2350
CO3_3: P7.4 R57.1 | length 384.2
  Bottom Layer w20: P7.4@2330,2450 2380,2400 R57.1@2380,2086.5
CO3_4: P7.5 R61.1 | length 123.5
  Bottom Layer w20: R61.1@2430,2226.5 P7.5@2430,2350
CO3_5: P7.6 R65.1 | length 384.2
  Bottom Layer w20: P7.6@2430,2450 2480,2400 R65.1@2480,2086.5
CO3_6: P7.7 R69.1 | length 123.5
  Bottom Layer w20: R69.1@2530,2226.5 P7.7@2530,2350
CO3_7: P7.8 R73.1 | length 384.2
  Bottom Layer w20: P7.8@2530,2450 2580,2400 R73.1@2580,2086.5
CO3_8: P7.9 R77.2 | length 128.5
  Bottom Layer w20: R77.2@2630,2221.5 P7.9@2630,2350
CO3_9: P7.10 R74.2 | length 384.2
  Bottom Layer w20: P7.10@2630,2450 2680,2400 R74.2@2680,2086.5
CO3_10: P7.11 R70.2 | length 128.5
  Bottom Layer w20: R70.2@2730,2221.5 P7.11@2730,2350
CO3_11: P7.12 R66.2 | length 384.2
  Bottom Layer w20: P7.12@2730,2450 2780,2400 R66.2@2780,2086.5
CO3_12: P7.13 R62.2 | length 128.5
  Bottom Layer w20: R62.2@2830,2221.5 P7.13@2830,2350
CO3_13: P7.14 R58.2 | length 384.2
  Bottom Layer w20: P7.14@2830,2450 2880,2400 R58.2@2880,2086.5
CO3_14: P7.15 R54.2 | length 123.5
  Bottom Layer w20: R54.2@2930,2226.5 P7.15@2930,2350
CO3_15: P7.16 R50.2 | length 384.2
  Bottom Layer w20: P7.16@2930,2450 2980,2400 R50.2@2980,2086.5
CO4_0: P6.1 R38.1 | length 123.5
  Bottom Layer w20: R38.1@3155,2226.5 P6.1@3155,2350
CO4_1: P6.2 R39.1 | length 384.2
  Bottom Layer w20: P6.2@3155,2450 3205,2400 R39.1@3205,2086.5
CO4_2: P6.3 R42.1 | length 123.5
  Bottom Layer w20: R42.1@3255,2226.5 P6.3@3255,2350
CO4_3: P6.4 R44.1 | length 384.2
  Bottom Layer w20: P6.4@3255,2450 3305,2400 R44.1@3305,2086.5
CO4_4: P6.5 R47.1 | length 123.5
  Bottom Layer w20: R47.1@3355,2226.5 P6.5@3355,2350
CO4_5: P6.6 R51.1 | length 384.2
  Bottom Layer w20: P6.6@3355,2450 3405,2400 R51.1@3405,2086.5
CO4_6: P6.7 R55.1 | length 123.5
  Bottom Layer w20: R55.1@3455,2226.5 P6.7@3455,2350
CO4_7: P6.8 R59.1 | length 384.2
  Bottom Layer w20: P6.8@3455,2450 3505,2400 R59.1@3505,2086.5
CO4_8: P6.9 R63.2 | length 123.5
  Bottom Layer w20: R63.2@3555,2226.5 P6.9@3555,2350
CO4_9: P6.10 R60.2 | length 384.2
  Bottom Layer w20: P6.10@3555,2450 3605,2400 R60.2@3605,2086.5
CO4_10: P6.11 R56.2 | length 123.5
  Bottom Layer w20: R56.2@3655,2226.5 P6.11@3655,2350
CO4_11: P6.12 R52.2 | length 384.2
  Bottom Layer w20: P6.12@3655,2450 3705,2400 R52.2@3705,2086.5
CO4_12: P6.13 R48.2 | length 123.5
  Bottom Layer w20: R48.2@3755,2226.5 P6.13@3755,2350
CO4_13: P6.14 R45.2 | length 384.2
  Bottom Layer w20: P6.14@3755,2450 3805,2400 R45.2@3805,2086.5
CO4_14: P6.15 R43.2 | length 123.5
  Bottom Layer w20: R43.2@3855,2226.5 P6.15@3855,2350
CO4_15: P6.16 R40.2 | length 384.2
  Bottom Layer w20: P6.16@3855,2450 3905,2400 R40.2@3905,2086.5
CPU_3V3: D1.1 D2.1 D3.1 D6.1 L1.2 L2.2 L3.2 L5.2 L6.2 P1.1 P2.1 pad.3 pad.9 pad.10 pad.11 pad.14 pad.26 pad.28 pad.29 pad.33 pad.34 pad.35 pad.38 pad.76 pad.78 pad.87 pad.88 Q1.1 Q2.1 Q3.1 Q4.1 Q5.1 Q6.1 Q7.1 Q8.1 R1.2 R3.1 R4.1 R5.2 R6.2 R8.2 R9.2 R10.2 R14.2 U4.24 U5.3 U5.21 U5.24 U6.3 U6.24 U7.21 U7.24 U9.11 U9.13 W2.2 | length 19304.1
  Top Layer w10: R1.2@795,1272.44 pad.14@845,1272.44 ; R14.2@925,1814.88 925,1815 1115,1815 pad.29@1250,1950 1490,1950 1510,1970 P1.1@1510,2025 ; 1050,890 1055,895 R3.1@1372.44,895 R4.1@1372.44,950 ; R5.2@1320,1642.44 pad.26@1320,1590 1320,1495 1380,1435 1380,1340 R9.2@1382.44,1340 ; R6.2@1450,1597.44 pad.28@1450,1545 1470,1525 R10.2@1497.44,1525 ; L3.2@2782.56,1455 2830,1455 2850,1475 pad.34@2850,1505
  Top Layer w15: pad.9@800,1510 pad.10@800,1680 855,1680 925,1750 R14.2@925,1814.88 ; L2.2@1990,652.44 P2.1@2125,652.44 ; pad.35@2580,1561.61 2636.61,1505 pad.34@2850,1505 2895,1505 pad.33@2950,1560 ; L1.2@2645,922.56 pad.3@2645,980
  Top Layer w20: pad.38@155,1110 155,440 U9.11@310,285 ; pad.11@985,975 pad.11@990,970 1050,910 1050,890 1050,220 1080,190 D1.1@1095,190 ; Q5.1@3907.68,1760 pad.78@3945,1760 ; Q3.1@3907.68,1960 pad.87@3945,1960 ; Q1.1@3907.68,2160 pad.88@3945,2160
  Top Layer w25: Q6.1@3697.68,1760 Q5.1@3907.68,1760 ; Q4.1@3697.68,1960 Q3.1@3907.68,1960 ; Q2.1@3697.68,2160 Q1.1@3907.68,2160 ; pad.76@3745,1390 3697.68,1437.32 Q8.1@3697.68,1560 Q7.1@3907.68,1560
  Top Layer w30: D3.1@2065,180 2065,515 2125,575 P2.1@2125,650 P2.1@2125,652.44
  Bottom Layer w10: U9.11@310,285 375,350 430,350 550,470 L5.2@550,497.44 ; pad.29@1250,1950 1250,1735 1320,1665 pad.26@1320,1590 1405,1590 pad.28@1450,1545 1450,1522.56 R8.2@1385,1457.56 ; pad.76@3745,1390 pad.76@3750,1390
  Bottom Layer w15: pad.38@155,1110 L6.2@155,1191.16 ; pad.11@990,970 845,1095 pad.14@845,1272.44 800,1317.44 pad.9@800,1510 800.43,1510.43 U4.24@900.83,1510.43 1280.43,1510.43 1320,1550 pad.26@1320,1590 ; U7.24@1825.83,1510.43 2114.57,1510.43 2195,1430 2605,1430 2685.43,1510.43 U6.24@2750.83,1510.43 2844.57,1510.43 pad.34@2850,1505 ; U7.21@1825.83,1587.2 2322.8,1587.2 2348.39,1561.61 U6.3@2479.17,1561.61 pad.35@2580,1561.61 ; pad.3@2645,980 3055,560 3550,560 ; pad.33@2950,1560 U5.3@3404.17,1561.61 3476.61,1561.61 3502.2,1587.2 U5.21@3675.83,1587.2 3732.8,1587.2 3745,1575 pad.76@3745,1390 ; U5.24@3675.83,1510.43 3744.57,1510.43
  Bottom Layer w20: 740,75 U9.13@740,285 ; 1085,75 D1.1@1085,180 ; 1860,75 D2.1@1860,180 ; pad.76@3750,1390 3945,1585 pad.78@3945,1760 pad.87@3945,1960 3975,1990 3975,2130 pad.88@3945,2160
  Bottom Layer w30: U9.11@310,285 310,140 375,75 740,75 1085,75 1860,75 3490,75 3550,135 D6.1@3550,180 3550,560 3745,755 pad.76@3745,1390 3410,1390 3285,1265 3115,1265 3070,1310 W2.2@3070,1370 ; 2065,80 D3.1@2065,180
E-CRS: U10.40
E-CSR: U1.92
E-MDC: pad.110 pad.111 U1.87 U10.31 | length 2498
  Top Layer w10: U10.31@594.29,1399.84 694.84,1399.84 pad.110@705,1410 ; pad.111@1895,1375 1895,1405 1934.37,1444.37 1934.37,1482.52
  Bottom Layer w10: pad.110@705,1410 755,1360 755,1120 1165,710 1485,710 1675,900 1675,1090 1715,1130 1915,1130 1980,1195 1980,1335 1960,1355 1915,1355 pad.111@1895,1375
E-MDIO: pad.108 pad.112 R100.2 U1.86 U10.30 | length 2855.4
  Top Layer w10: U10.30@594.29,1380.16 750,1380.16 ; R100.2@640,1622.44 707.56,1622.44 750,1580 750,1380.16 ; pad.108@920,1395 905.16,1380.16 750,1380.16 ; pad.112@1945,1320 1925,1340 1925,1405 1954.37,1434.37 U1.86@1954.37,1522.24
  Bottom Layer w10: pad.108@920,1395 920,1120 1060,980 1060,845 1175,730 1475,730 1655,910 1655,1100 1705,1150 1906.72,1150 1945,1188.28 pad.112@1945,1320
E-REF-CLK: pad.39 pad.40 pad.120 U1.88 U10.34 Y3.3 | length 3494.8
  Top Layer w10: pad.120@250,2085 250,2120 395,2265 1735,2265 1915,2085 U1.88@1915,1522.24 ; pad.39@320,1856.57 Y3.3@576.57,1856.57 ; pad.40@470,1460 471.1,1458.9 U10.34@594.29,1458.9
  Bottom Layer w10: pad.120@250,2085 250,1926.57 pad.39@320,1856.57 320,1750 470,1600 pad.40@470,1460
E-RX-ER: pad.98 pad.104 pad.105 pad.106 U1.89 U10.41 | length 2965.4
  Top Layer w10: pad.104@295,1725 295,1880 pad.105@330,1915 ; pad.106@295,2115 425,2245 1723.28,2245 1895.63,2072.65 1895.32,2072.65 U1.89@1895.32,1522.24 ; pad.98@350,1670 415,1670 454.53,1630.47 U10.41@454.53,1559.29
  Bottom Layer w10: pad.104@295,1725 pad.98@350,1670 ; pad.106@295,2115 295,1950 pad.105@330,1915
E-RXD0: pad.99 pad.101 U1.91 U10.43 | length 2916
  Top Layer w10: pad.101@185,1710 185,1930 450,2195 1720,2195 1855.94,2059.06 U1.91@1855.94,1522.24 ; pad.99@385,1640 415.16,1609.84 U10.43@415.16,1559.29
  Bottom Layer w10: pad.101@185,1710 255,1640 pad.99@385,1640
E-RXD1: pad.100 pad.102 U1.90 U10.44 | length 3007.2
  Top Layer w10: pad.102@160,1675 160,1940 440,2220 1720,2220 1875.63,2064.37 U1.90@1875.63,1522.24 ; pad.100@350,1615 375,1615 395.47,1594.53 U10.44@395.47,1559.29
  Bottom Layer w10: pad.102@160,1675 220,1615 pad.100@350,1615
E-TX-EN: pad.121 pad.122 U1.93 U10.2 | length 2886.8
  Top Layer w10: pad.122@115,1495 115,1570 220,1675 220,1930 460,2170 1675,2170 1816.57,2028.43 U1.93@1816.57,1522.24 ; pad.121@200,1495 216.42,1478.58 U10.2@255.71,1478.58
  Bottom Layer w10: pad.122@115,1495 pad.121@200,1495
E-TXD0: U1.95 U10.3 | length 2715.9
  Top Layer w10: U10.3@255.71,1458.9 181.1,1458.9 165,1475 165,1560 260,1655 260,1910 480,2130 1654.41,2130 1777.2,2007.2 U1.95@1777.2,1522.24
E-TXD1: U1.94 U10.4 | length 2818.4
  Top Layer w10: U10.4@255.71,1439.21 170.79,1439.21 145,1465 145,1571.72 240,1666.72 240,1920 470,2150 1665,2150 1796.89,2018.11 U1.94@1796.89,1522.24
F-C\S\: U1.63 U3.4 | length 651.7
  Top Layer w10: U1.63@2212.24,1225 2715,1225 2780.79,1159.21 U3.4@2780.79,1103.27
F-R\E\S\: U1.59 U3.3 | length 597.3
  Top Layer w10: U1.59@2212.24,1146.26 2373.74,1146.26 2440,1080 2570,1080 2595,1055 2719.21,1055 2729.61,1065.39 U3.3@2729.61,1103.27
F-SCK: U1.62 U3.2 | length 545.5
  Top Layer w10: U1.62@2212.24,1205.32 2639.69,1205.32 2678.43,1166.57 U3.2@2678.43,1103.27
F-SI: U1.60 U3.1 | length 441
  Top Layer w10: U1.60@2212.24,1165.94 2389.06,1165.94 2451.73,1103.27 U3.1@2627.24,1103.27